# EAGLE board w (EAGLE 7.1.0)
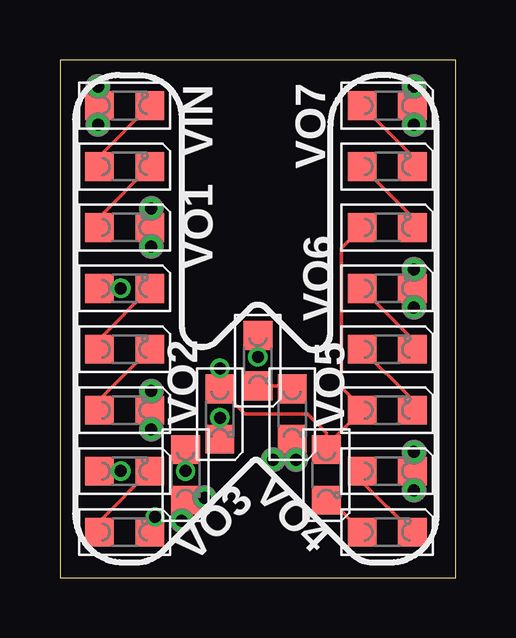
[diagram p0: board, top side]
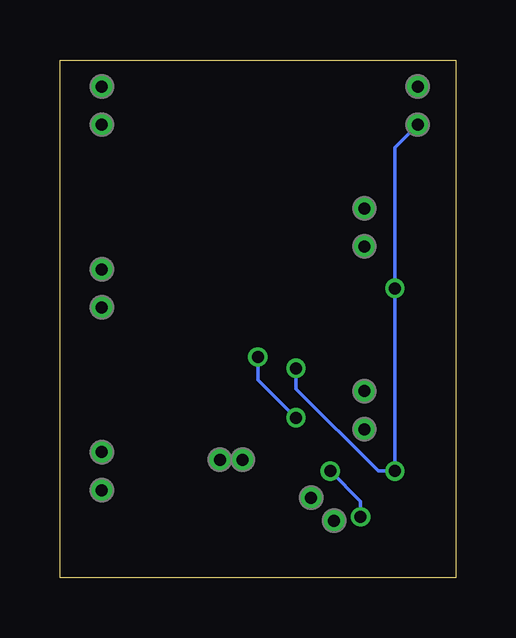
[diagram p1: board, bottom side, seen from below]

Size 16.51 x 21.59 mm. Coordinates in mm from the lower left corner, seen from the top.
Outline: 0,0 16.51,0 16.51,21.59 0,21.59 0,0
Copper layers (1*16): Top 0.035mm / dielectric 1.5mm / Bottom 0.035mm
Design rules "Fusion_eagle_rule_v1.1_tms *": minimum track width 6mil, minimum drill 12mil, track to track 6mil, track to pad 6mil, pad to pad 6mil, via to via 6mil, smd to smd 0mil, copper to edge 10mil, drill to drill 10mil, minimum pad ring 10mil, minimum via ring 6mil, stop-mask expansion 2mil, vias tented up to drill 100mil, thermal gap 10mil

## Footprints (pad centres in the part's own frame; a part is rotated, then mirrored left to right if it is on the bottom)
LED_0805 = smd 1.2 x 1.2: A 0,-1.05; C 0,1.05
P1-20 = drill 0.5: TP 0,0

## Placement (x,y rotation side)
LED1  [LED_0805]  2.7,19.68 270 top
LED2  [LED_0805]  2.7,17.14 270 top
LED3  [LED_0805]  2.7,14.61 270 top
LED4  [LED_0805]  2.7,12.06 270 top
LED5  [LED_0805]  2.7,9.53 270 top
LED6  [LED_0805]  2.7,6.99 270 top
LED7  [LED_0805]  2.7,4.45 270 top
LED8  [LED_0805]  2.7,1.91 270 top
LED9  [LED_0805]  5.24,4.29 180 top
LED10  [LED_0805]  6.67,6.83 180 top
LED11  [LED_0805]  8.26,9.05 180 top
LED12  [LED_0805]  9.68,6.83 180 top
LED13  [LED_0805]  11.11,4.29 180 top
LED14  [LED_0805]  13.65,1.91 270 top
LED15  [LED_0805]  13.65,4.45 270 top
LED16  [LED_0805]  13.65,6.99 270 top
LED17  [LED_0805]  13.65,9.53 270 top
LED18  [LED_0805]  13.65,12.06 270 top
LED19  [LED_0805]  13.65,14.61 270 top
LED20  [LED_0805]  13.65,17.14 270 top
LED21  [LED_0805]  13.65,19.68 270 top
VIN  [P1-20]  1.59,18.89 0 top
VIN1  [P1-20]  1.59,20.48 0 top
VO1  [P1-20]  3.81,13.81 0 top
VO2  [P1-20]  3.81,6.19 0 top
VO3  [P1-20]  5.08,2.38 0 top
VO4  [P1-20]  8.89,4.92 0 top
VO5  [P1-20]  14.76,3.65 0 top
VO6  [P1-20]  14.76,11.27 0 top
VO7  [P1-20]  14.76,18.89 0 top
VO8  [P1-20]  3.81,15.4 0 top
VO9  [P1-20]  3.81,7.78 0 top
VO10  [P1-20]  6.03,3.33 0 top
VO11  [P1-20]  9.84,4.92 0 top
VO12  [P1-20]  14.76,5.24 0 top
VO13  [P1-20]  14.76,12.86 0 top
VO14  [P1-20]  14.76,20.48 0 top

## Library data of the parts
LED1-LED21 VIN VIN1 VO1-VO14 = CyberRailGuru

## Nets
N$1: LED19.C LED20.A
N$2: LED20.C LED21.A
N$25: LED2.C LED3.A
N$26: LED1.C LED2.A
N$29: LED5.C LED6.A
N$30: LED4.C LED5.A
N$31: LED8.C LED9.A
N$32: LED7.C LED8.A
N$33: LED11.C LED12.A
N$34: LED10.C LED11.A
N$35: LED14.C LED15.A
N$36: LED13.C LED14.A
N$37: LED17.C LED18.A
N$38: LED16.C LED17.A
VIN: LED1.A LED4.A LED7.A LED10.A LED13.A LED16.A LED19.A VIN1.TP VIN.TP
VOUT1: LED3.C VO1.TP VO8.TP
VOUT2: LED6.C VO2.TP VO9.TP
VOUT3: LED9.C VO3.TP VO10.TP
VOUT4: LED12.C VO4.TP VO11.TP
VOUT5: LED15.C VO5.TP VO12.TP
VOUT6: LED18.C VO6.TP VO13.TP
VOUT7: LED21.C VO7.TP VO14.TP

## Tracks (layer width: path | path; a pad name or v marks a point on that pad's centre or on a via)
N$1
  Top 0.152: LED19.C 14.7,15.04 LED20.A
N$2
  Top 0.152: LED20.C 14.7,17.59 LED21.A
N$25
  Top 0.152: LED3.A 1.65,15.04 LED2.C
N$26
  Top 0.152: LED2.A 1.65,17.59 LED1.C
N$29
  Top 0.152: LED6.A 1.65,7.42 LED5.C
N$30
  Top 0.152: LED5.A 1.65,9.96 LED4.C
N$31  (via drill 0.5)
  Top 0.152: 3.81,1.91 LED8.C 3.97,2.12 v3.97,2.54 | v5.24,4.45 LED9.A 5.24,5.4
  Bottom 0.152: v3.97,2.54 3.97,3.17 v5.24,4.45
N$32
  Top 0.152: LED8.A 1.65,2.35 LED7.C
N$33
  Top 0.152: LED11.C 9.56,8 LED12.A
N$34  (via drill 0.5)
  Top 0.152: LED10.C v6.67,6.67 | LED11.A v8.26,9.21
  Bottom 0.152: v6.67,6.67 8.26,8.26 v8.26,9.21
N$35
  Top 0.152: LED15.A 12.6,4 LED14.C
N$36
  Top 0.152: LED13.C 11.27,3.24 LED14.A
N$37
  Top 0.152: LED17.C 14.7,9.96 LED18.A
N$38
  Top 0.152: LED16.C 14.7,7.42 LED17.A
VIN  (via drill 0.5)
  Top 0.152: VIN1.TP 1.65,20.42 LED1.A 1.65,18.95 VIN.TP | 1.59,4.45 LED7.A v2.54,4.45 | LED19.A 11.75,13.75 11.75,7.94 12.6,7.08 LED16.A 11.11,5.5 LED13.A 11.11,6.03 10.32,6.83 7.72,6.83 LED10.A v6.67,8.73 | LED4.A v2.54,12.06
  Bottom 0.152: v6.67,8.73 LED10.A 3.24,4.45 v2.54,4.45 v2.54,12.06 2.54,17.94 VIN.TP
VOUT1
  Top 0.152: VO8.TP 3.75,15.34 LED3.C 3.75,13.87 VO1.TP
VOUT2
  Top 0.152: VO2.TP 3.75,6.25 LED6.C 3.75,7.72 VO9.TP
VOUT3
  Top 0.152: VO3.TP 5.08,3.08 LED9.C 5.34,3.33 VO10.TP
VOUT4
  Top 0.152: LED12.C 9.68,5.08 VO11.TP VO4.TP
VOUT5
  Top 0.152: VO5.TP 14.7,3.71 LED15.C 14.7,5.18 VO12.TP
VOUT6
  Top 0.152: VO13.TP 14.7,12.8 LED18.C 14.7,11.33 VO6.TP
VOUT7
  Top 0.152: VO7.TP 14.7,18.95 LED21.C 14.7,20.42 VO14.TP

## Text on the board
201bmp: W